# Altium PCB mo_phong_may_bay_pcb.PcbDoc
Units mil, origin at the board's own origin, x right, y up, seen from the top; angles counter-clockwise.
Board outline 2362.2 x 2165.35 mil, 2 copper layers (Top Layer, Bottom Layer); 98 components, 75 nets, 328 pads, 80 vias.
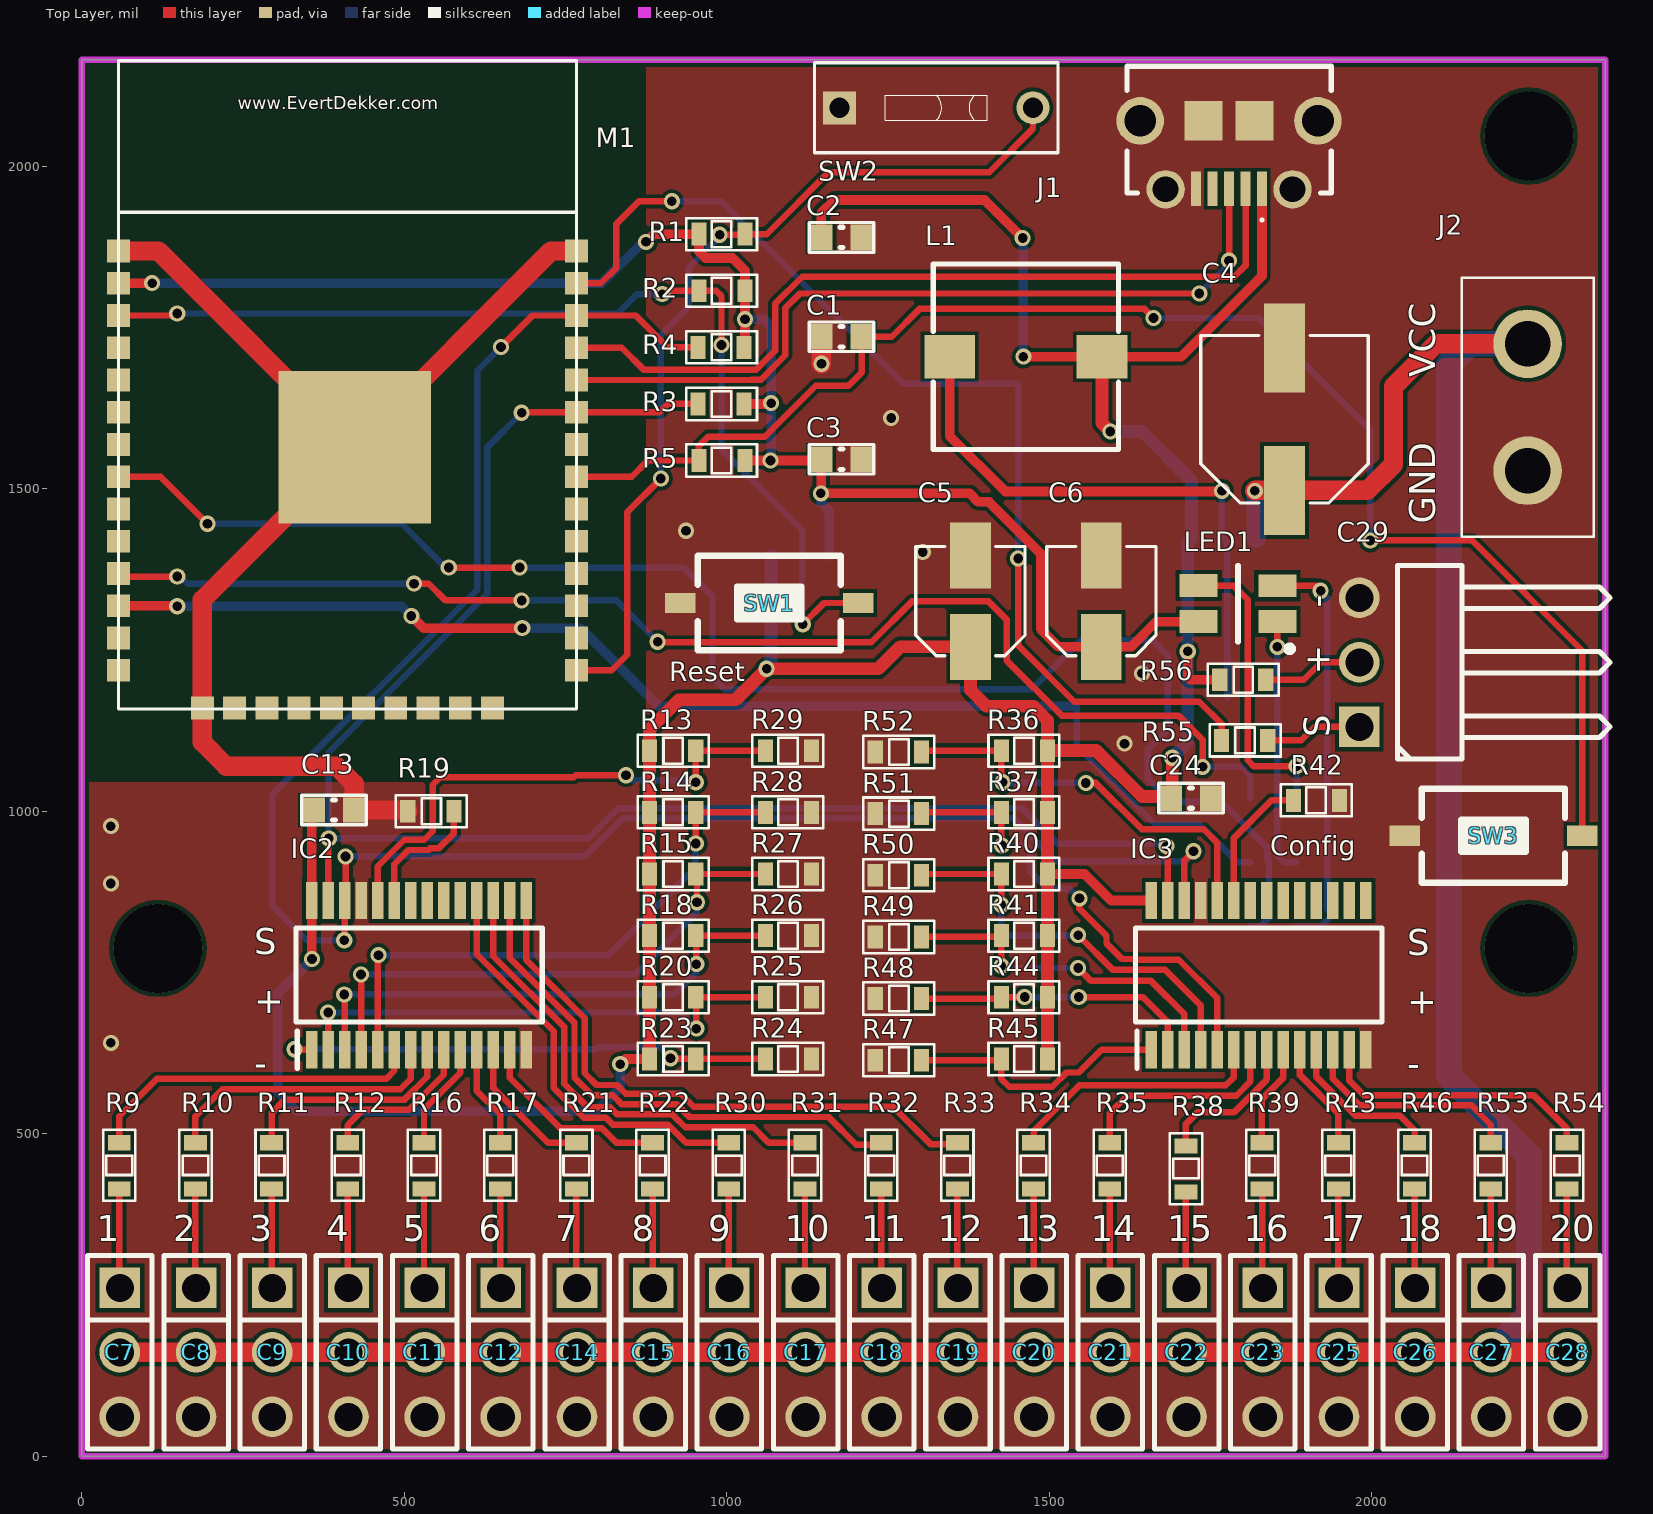
[diagram p0: Top Layer view]
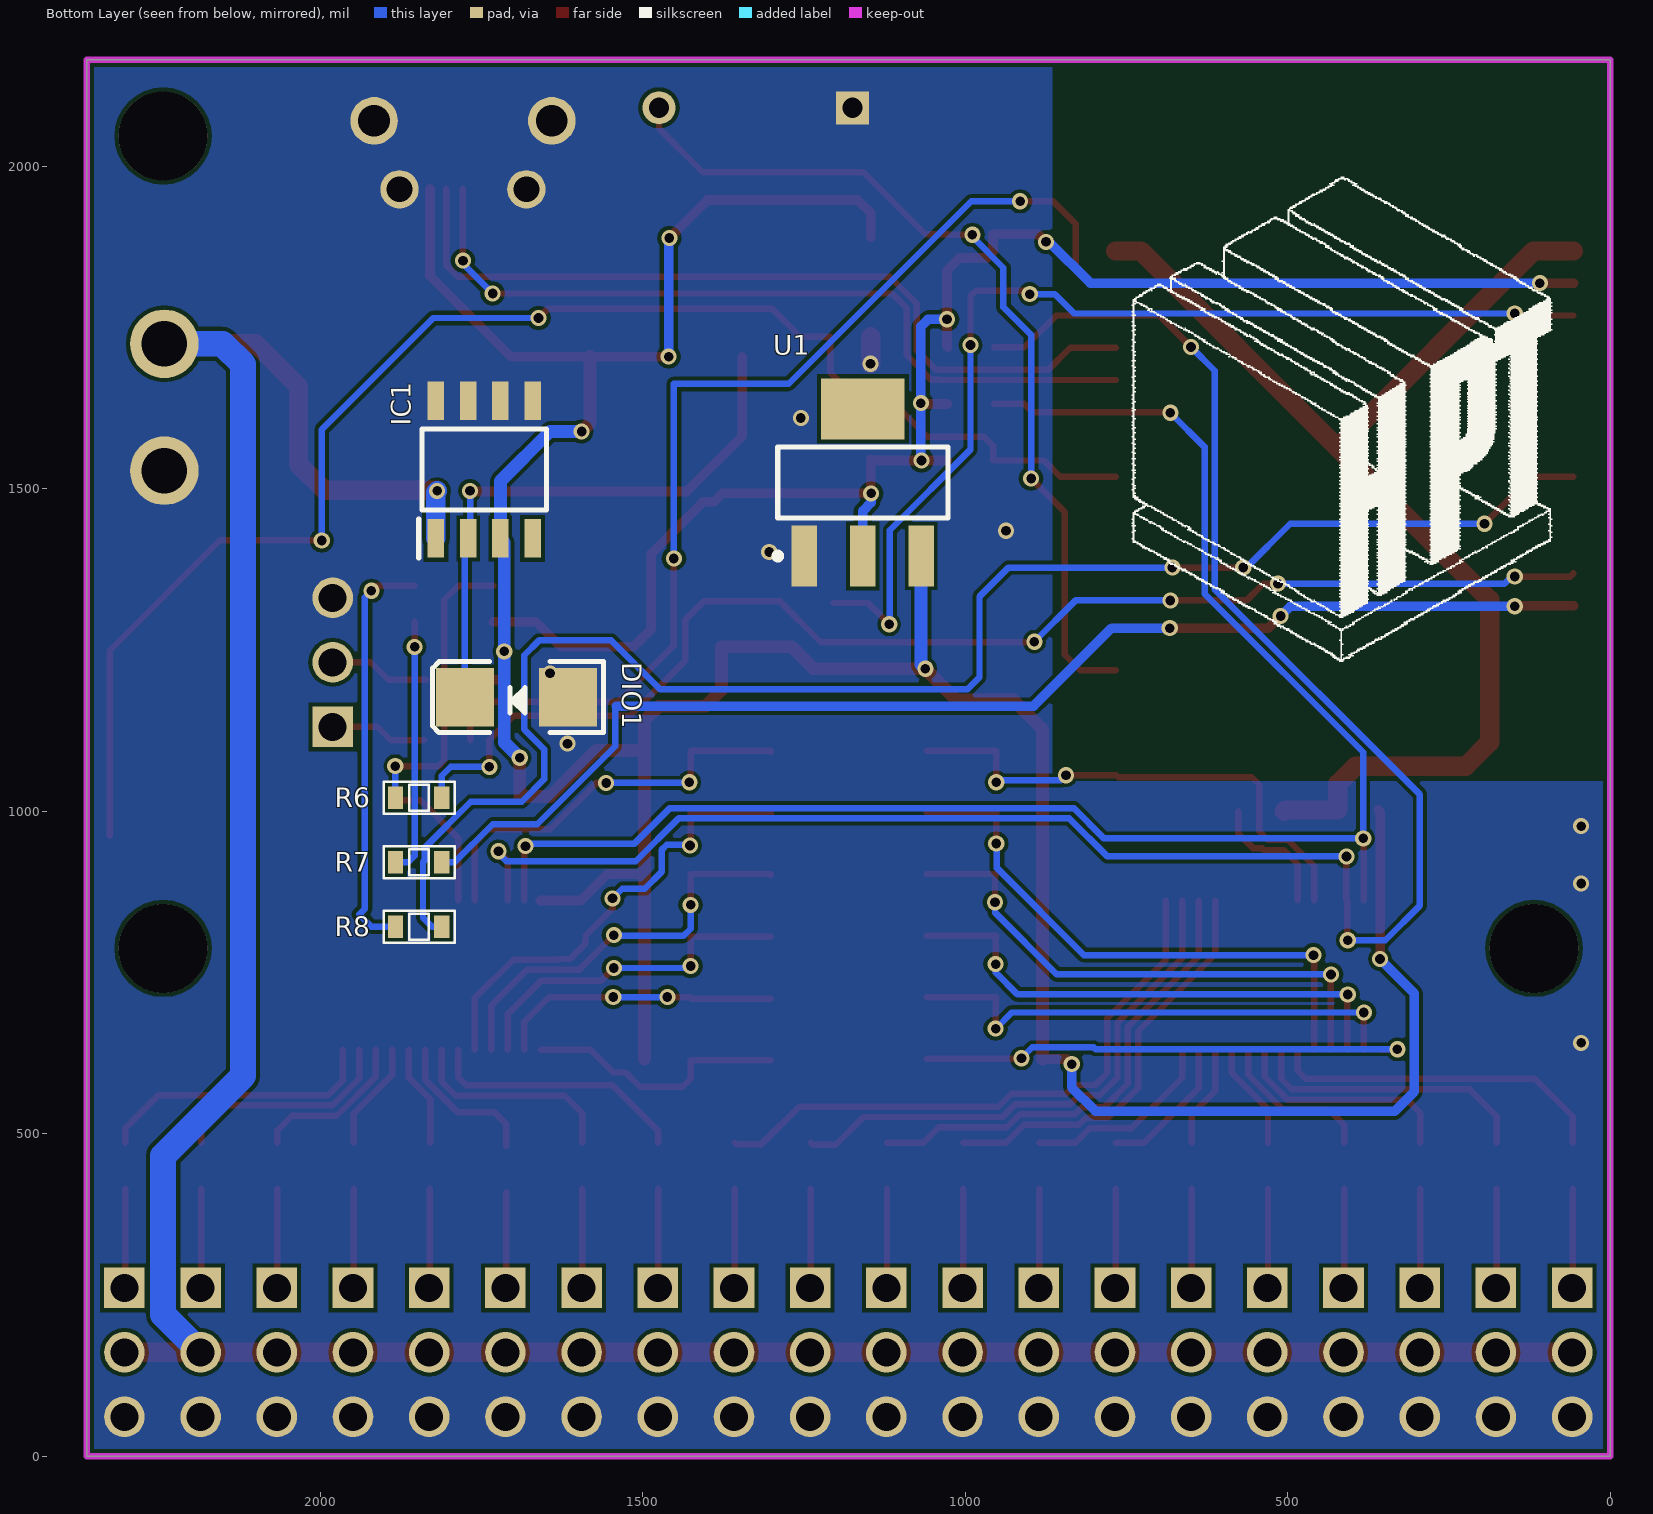
[diagram p1: Bottom Layer view, seen from below]
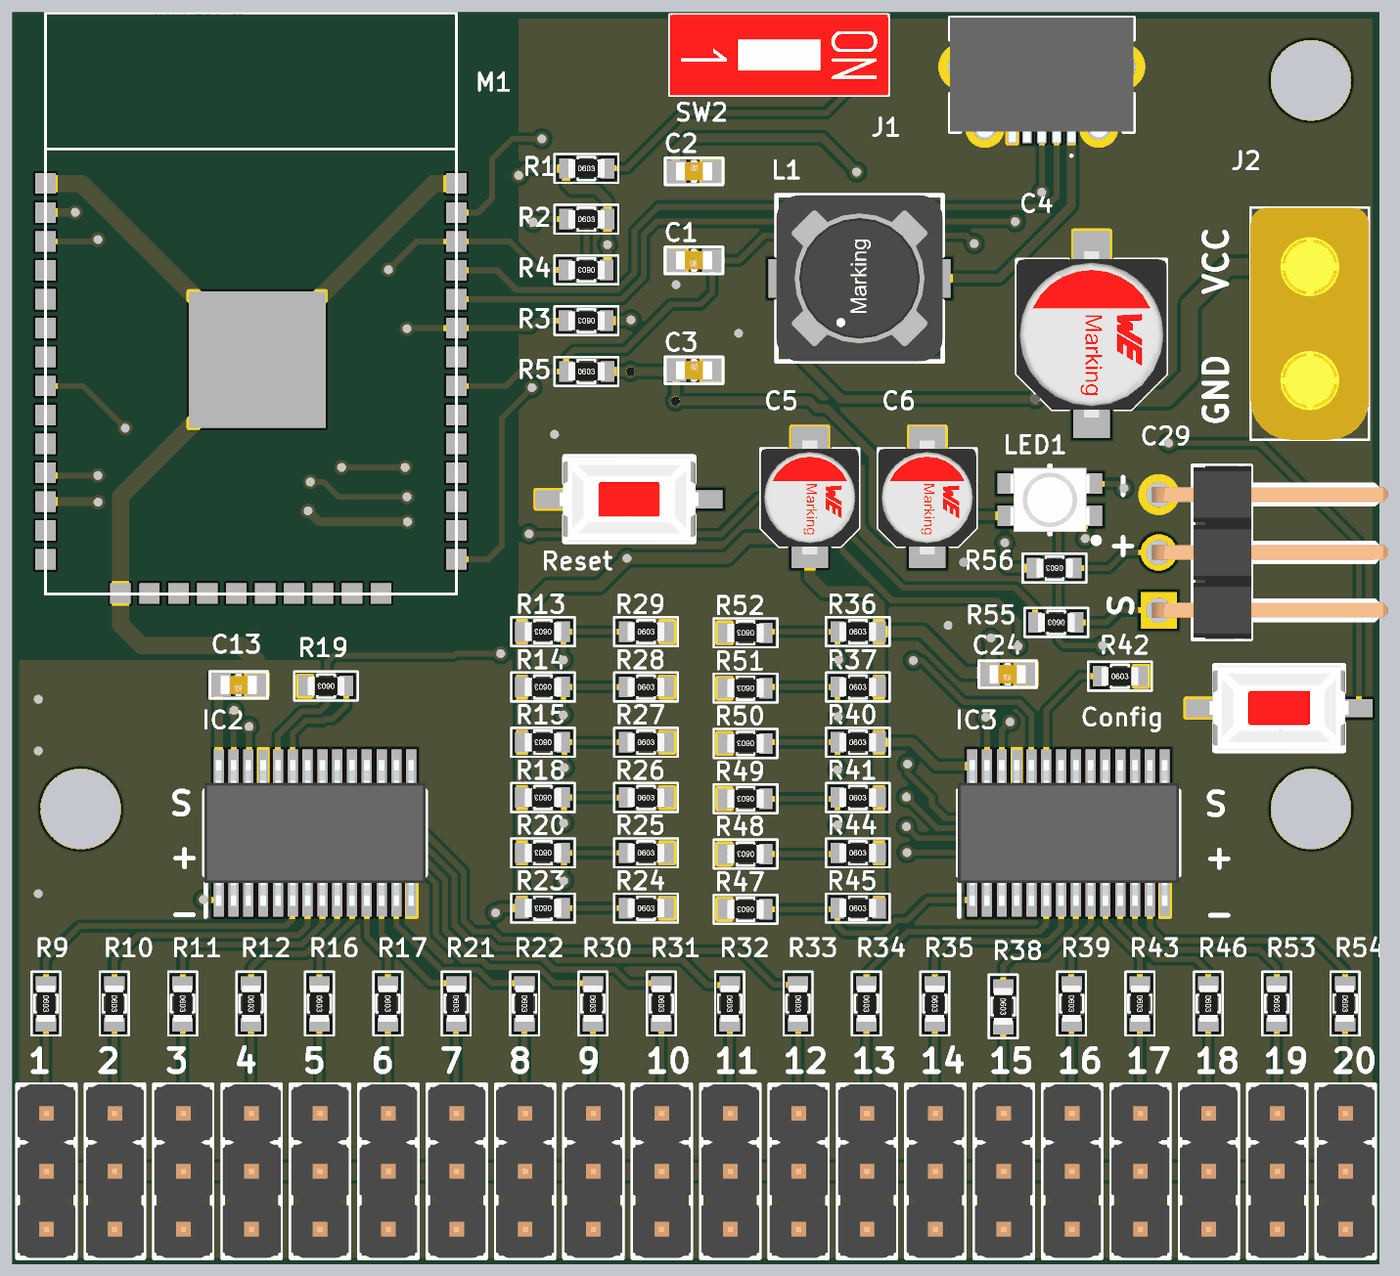
[diagram p2: 3D render of the assembled board from above, using the file's embedded part models]
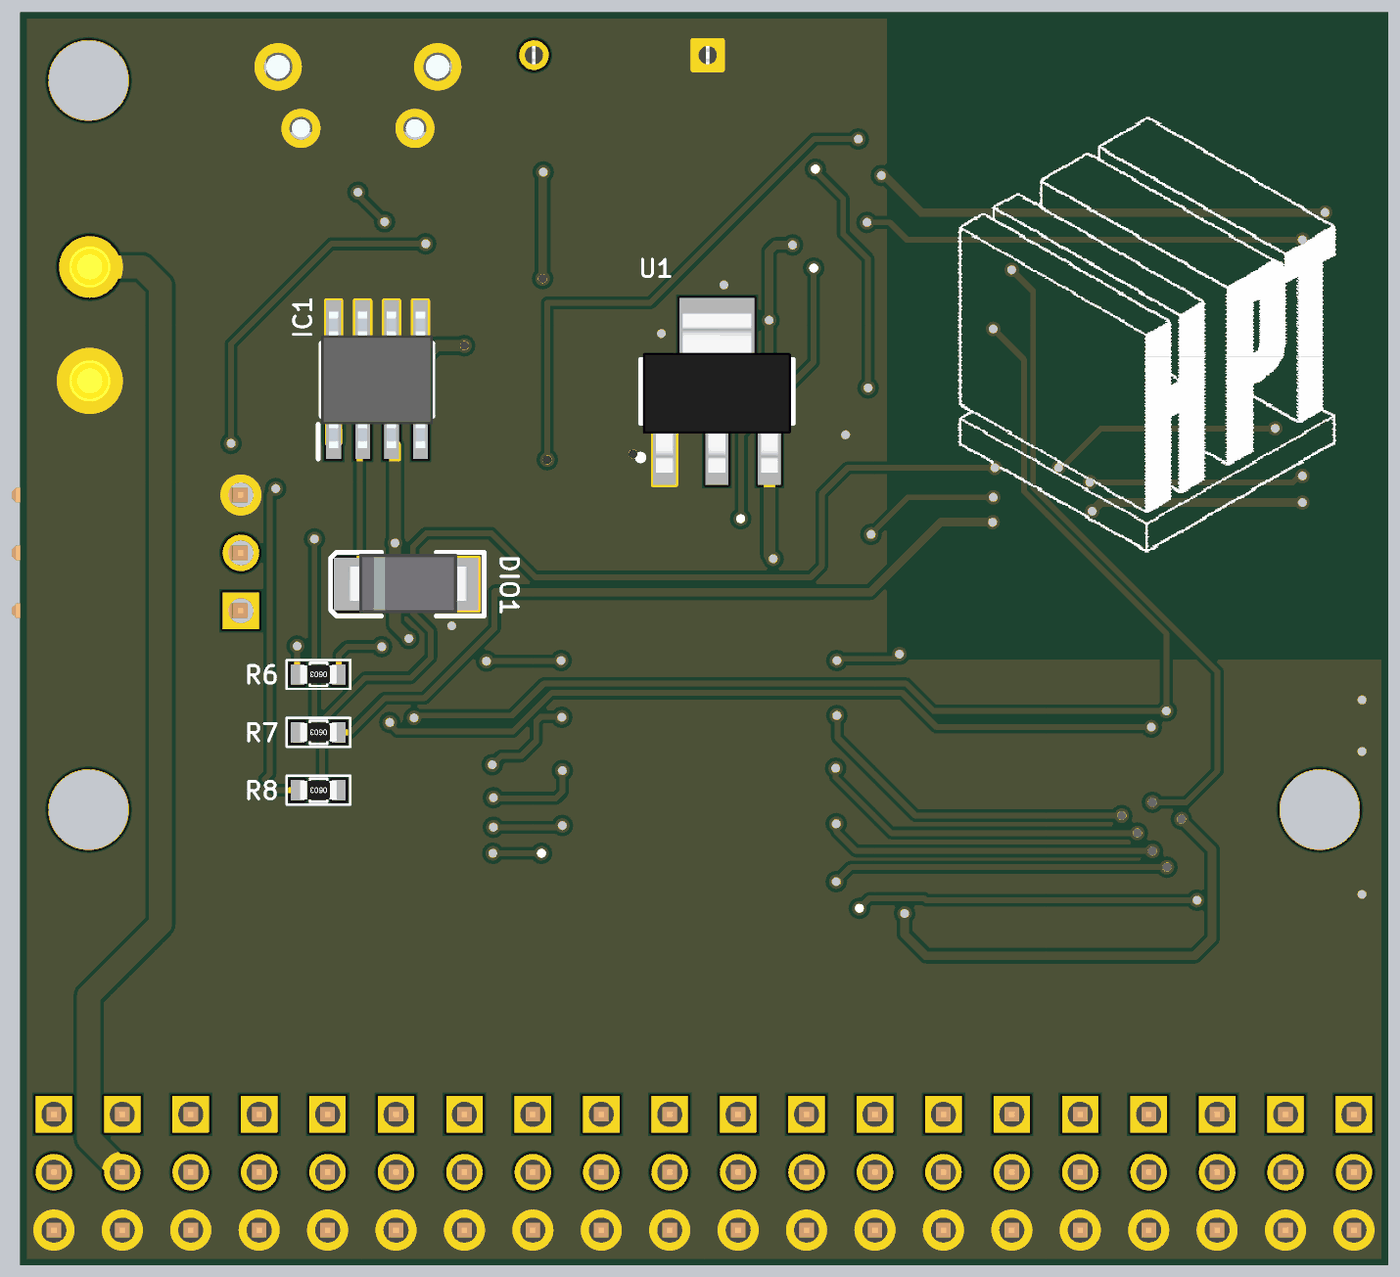
[diagram p3: 3D render of the assembled board from below, using the file's embedded part models]

## Layer stack, top to bottom
Top Solder: solder mask 0.4, Solder Resist, Dk 3.5
Top Layer: signal copper 1.4
Dielectric 1: dielectric 12.6, FR-4, Dk 4.8
Bottom Layer: signal copper 1.4
Bottom Solder: solder mask 0.4, Solder Resist, Dk 3.5

## Board outline
0,0 0,2165.35 2362.2,2165.35 2362.2,0

## Design rules (kind name [scope] priority, off if disabled: settings)
Clearance [All] p1: gap=6
PlaneConnect [All] p1: planeconnectstyle=Direct reliefexpansion=20 reliefentries=4 reliefconductorwidth=10 reliefairgap=10
PolygonConnect [All] p1: connectstyle=Direct reliefconductorwidth=10 reliefentries=4 polygonreliefangle="90 Angle" airgapwidth=10
RoomDefinition [3]Motor [InComponentClass('[3]Motor')] p1: confinementstyle=ConfineIn formatcopy=TRUE lockcomponents=FALSE outline 3300,1785 18415,1785 18415,2205 3300,2205
RoomDefinition [2]Power [InComponentClass('[2]Power')] p2: confinementstyle=ConfineIn formatcopy=TRUE lockcomponents=FALSE outline 3300,1245 5935,1245 5935,1735 3300,1735
RoomDefinition [1]Esp32 [InComponentClass('[1]Esp32')] p3: confinementstyle=ConfineIn formatcopy=TRUE lockcomponents=FALSE outline 3300,50 6530,50 6530,1195 3300,1195
RoutingVias [All] p1: holewidth=15 width=25 viastyle="Through Hole" minholewidth=15 minwidth=25 maxholewidth=28 maxwidth=50
SolderMaskExpansion [All] p1: expansion=4
Width [All] p1: maxlimit=50 minlimit=8 preferedwidth=10
29 further rules are at their usual default settings.

## Classes and differential pairs
component class [1]Esp32: C1 C29 J1 LED1 M1 R1 R2 R3 R4 R5 R6 R7 R8 R55 R56 SW1 SW2 SW3
component class [2]Power: C2 C3 C4 C5 C6 DIO1 IC1 J2 L1 U1
component class [3]Motor: C7 C8 C9 C10 C11 C12 C13 C14 C15 C16 C17 C18 C19 C20 C21 C22 C23 C24 C25 C26 C27 C28 IC2 IC3 R9 R10 R11 R12 R13 R14 R15 R16 R17 R18 R19 R20 R21 R22 R23 R24 R25 R26 R27 R28 R29 R30 R31 R32 R33 R34 R35 R36 R37 R38 R39 R40 R41 R42 R43 R44 R45 R46 R47 R48 R49 R50 R51 R52 R53 R54

## Components (designator, comment, footprint, x,y, rotation, side; value= is the part's Value field where it differs from the comment)
C1 "10uF" CN-SMD-0603 1178,1736 r180 top
C2 "10uF" CN-SMD-0603 1178,1890 r0 top
C3 "10uF" CN-SMD-0603 1178,1546 r0 top
C4 "470uF" CAP-ALU-SMD-6.3x7.7x2.2 1865,1608 r90 top
C5 "CN-ALU-SMD" CAP-ALU-SMD-4.5x5x1.4 1378,1326 r90 top
C6 "CN-ALU-SMD" CAP-ALU-SMD-4.5x5x1.4 1581,1326 r90 top
C7 "JP3" JP3-D1T 59,261 r270 top
C8 "JP3" JP3-D1T 177.16,261 r270 top
C9 "JP3" JP3-D1T 295.32,261 r270 top
C10 "JP3" JP3-D1T 413.47,261 r270 top
C11 "JP3" JP3-D1T 531.63,261 r270 top
C12 "JP3" JP3-D1T 649.79,261 r270 top
C13 "0.1uF" CN-SMD-0603 391,1002 r180 top
C14 "JP3" JP3-D1T 767.95,261 r270 top
C15 "JP3" JP3-D1T 886.1,261 r270 top
C16 "JP3" JP3-D1T 1004.26,261 r270 top
C17 "JP3" JP3-D1T 1122.42,261 r270 top
C18 "JP3" JP3-D1T 1240.58,261 r270 top
C19 "JP3" JP3-D1T 1358.74,261 r270 top
C20 "JP3" JP3-D1T 1476.89,261 r270 top
C21 "JP3" JP3-D1T 1595.05,261 r270 top
C22 "JP3" JP3-D1T 1713.21,261 r270 top
C23 "JP3" JP3-D1T 1831.37,261 r270 top
C24 "0.1uF" CN-SMD-0603 1720,1020.54 r180 top
C25 "JP3" JP3-D1T 1949.52,261 r270 top
C26 "JP3" JP3-D1T 2067.68,261 r270 top
C27 "JP3" JP3-D1T 2185.84,261 r270 top
C28 "JP3" JP3-D1T 2304,261 r270 top
C29 "JP3" JP3-D1C 2081,1381 r90 top
DIO1 "SS34" DIO-SMD-106 1696,1177 r180 bottom
IC1 "XL1509-5.0E1" SOIC127P600X175-8N 1746,1530 r90 bottom
IC2 "PCA9685PW,112" SOP65P640X110-28N 523,746 r90 top
IC3 "PCA9685PW,112" SOP65P640X110-28N 1825,746 r90 top
J1 "10118194-0001LF_BKN" 101181940001LFBKN 1779,2057 r180 top
J2 "XT30PB" XT30PB 2242,1725 r0 top
L1 "1.0 μH" L-SMD-M-7.3x4.5 1464,1705 r270 top
LED1 "150141M173100" "LED RGB 3528" 1793,1322 r180 top
M1 "ESP32S_Module" ESP32S 57,1158.85 r0 top
R1 "10K" RES-SMD-0603 992,1895 r0 top
R2 "10K" RES-SMD-0603 992,1807.25 r0 top
R3 "4K7" RES-SMD-0603 991.99,1631.75 r180 top
R4 "4K7" RES-SMD-0603 991.99,1719.5 r180 top
R5 "10K" RES-SMD-0603 992,1544 r0 top
R6 "3K3" RES-SMD-0603 1847,1021 r0 bottom
R7 "3K3" RES-SMD-0603 1847,921 r0 bottom
R8 "3K3" RES-SMD-0603 1847,821 r0 bottom
R9 "220R" RES-SMD-0603 58,451 r270 top
R10 "220R" RES-SMD-0603 176.16,451 r270 top
R11 "220R" RES-SMD-0603 294.32,451 r270 top
R12 "220R" RES-SMD-0603 412.47,451 r270 top
R13 "0R" RES-SMD-0603 917,1094 r180 top
R14 "DNI" RES-SMD-0603 917,998.4 r180 top
R15 "DNI" RES-SMD-0603 917,902.8 r180 top
R16 "220R" RES-SMD-0603 530.63,451.01 r270 top
R17 "220R" RES-SMD-0603 648.79,451 r270 top
R18 "DNI" RES-SMD-0603 917,807.2 r180 top
R19 "10K" RES-SMD-0603 542,1000 r180 top
R20 "DNI" RES-SMD-0603 917,711.6 r180 top
R21 "220R" RES-SMD-0603 766.95,451.01 r270 top
R22 "220R" RES-SMD-0603 885.1,451 r270 top
R23 "0R" RES-SMD-0603 917,616 r180 top
R24 "10K" RES-SMD-0603 1095,616 r0 top
R25 "10K" RES-SMD-0603 1095,711.6 r0 top
R26 "10K" RES-SMD-0603 1095,807.2 r0 top
R27 "10K" RES-SMD-0603 1095,902.8 r0 top
R28 "10K" RES-SMD-0603 1095,998.4 r0 top
R29 "10K" RES-SMD-0603 1095,1094 r0 top
R30 "220R" RES-SMD-0603 1003.26,451.01 r270 top
R31 "220R" RES-SMD-0603 1121.42,451 r270 top
R32 "220R" RES-SMD-0603 1239.58,451 r270 top
R33 "220R" RES-SMD-0603 1357.74,451 r270 top
R34 "220R" RES-SMD-0603 1475.89,451 r270 top
R35 "220R" RES-SMD-0603 1594.05,451 r270 top
R36 "0R" RES-SMD-0603 1461,1094 r0 top
R37 "0R" RES-SMD-0603 1461,998.4 r0 top
R38 "220R" RES-SMD-0603 1712.21,446 r270 top
R39 "220R" RES-SMD-0603 1830.37,451 r270 top
R40 "DNI" RES-SMD-0603 1461,902.8 r0 top
R41 "DNI" RES-SMD-0603 1461,807.2 r0 top
R42 "10K" RES-SMD-0603 1914,1017 r0 top
R43 "220R" RES-SMD-0603 1948.52,451 r270 top
R44 "DNI" RES-SMD-0603 1461,711.6 r0 top
R45 "0R" RES-SMD-0603 1461,616 r0 top
R46 "220R" RES-SMD-0603 2066.68,451.01 r270 top
R47 "10K" RES-SMD-0603 1267,614 r180 top
R48 "10K" RES-SMD-0603 1267,709.6 r180 top
R49 "10K" RES-SMD-0603 1267,805.2 r180 top
R50 "10K" RES-SMD-0603 1267,900.8 r180 top
R51 "10K" RES-SMD-0603 1267,996.4 r180 top
R52 "10K" RES-SMD-0603 1267,1092 r180 top
R53 "220R" RES-SMD-0603 2184.84,451 r270 top
R54 "220R" RES-SMD-0603 2303,451.01 r270 top
R55 "220R" RES-SMD-0603 1804,1110 r180 top
R56 "DNI" RES-SMD-0603 1801,1204 r180 top
SW1 "Reset" SW1-SMD 1066,1323 r180 top
SW2 "Flash" SW-DIP1-1 1325,2091 r270 top
SW3 "Config" SW1-SMD 2189,962 r0 top
U1 "LM1117-3.3V" SOT223 1159,1510 r180 bottom

## Footprints (in the part's own frame and the unit in brackets; to place one, negate y for a bottom-side part, rotate by r counter-clockwise, add the part's x,y. Pads: shape width x height; smd on the part's side, far side on the other; paste and mask are expansions set on the pad)
101181940001LFBKN [mm]
  rect 0.4x1.35 smd: 1(-1.3,2.325) 2(-0.65,2.325) 3(0,2.325) 4(0.65,2.325) 5(1.3,2.325)
  round 1.515 hole 1.01: MH1(-2.5,2.35) MH2(2.5,2.35)
  round 1.875 hole 1.25: MH3(-3.5,-0.35) MH4(3.5,-0.35)
  rect 1.5x1.55 smd: MP1(-1,-0.35) MP2(1,-0.35)
  silkscreen extent -4.03,-2.5 4.03,3.6, body extent -4.03,-2.5 4.03,2.96, height 2.88
CAP-ALU-SMD-4.5x5x1.4 [mm]
  rect 2.6x1.6 smd: 1(-1.8,0) 2(1.8,0)
  silkscreen extent -2.15,-2.15 2.15,2.15, body extent -2.5,-2.15 2.5,2.15, height 5.45
CAP-ALU-SMD-6.3x7.7x2.2 [mm]
  rect 3.5x1.6 smd: 1(-2.8,0) 2(2.8,0)
  silkscreen extent -3.3,-3.3 3.3,3.3, body extent -3.65,-3.3 3.65,3.3, height 7.65
CN-SMD-0603 [mm]
  rect 0.9x1 smd: 1(-0.8,0) 2(0.8,0)
  silkscreen extent -1.27,-0.58 1.27,0.58, body extent -0.8,-0.4 0.8,0.4, height 0.3
DIO-SMD-106 [mil]
  rect 90x90.55 smd: 1(80,0) 2(-80,0)
  silkscreen extent -130,-55 135,55, body extent -99,-50 106,52, height 95
ESP32S [mm] "ESP32S-Module"
  rect 0.9x0.9 smd: 1(0,18.034) 2(0,16.764) 3(0,15.494) 4(0,14.224) 5(0,12.954) 6(0,11.684) 7(0,10.414) 8(0,9.144) 9(0,7.874) 10(0,6.604) 11(0,5.334) 12(0,4.064) 13(0,2.794) 14(0,1.524) 15(3.3,0.034) 16(4.57,0.034) 17(5.84,0.034) 18(7.11,0.034) 19(8.38,0.034) 20(9.65,0.034) 21(10.92,0.034) 22(12.19,0.034) 23(13.46,0.034) 24(14.73,0.034) 25(18.034,1.524) 26(18.034,2.794) 27(18.034,4.064) 28(18.034,5.334) 29(18.034,6.604) 30(18.034,7.874) 31(18.034,9.144) 32(18.034,10.414) 33(18.034,11.684) 34(18.034,12.954) 35(18.034,14.224) 36(18.034,15.494) 37(18.034,16.764) 38(18.034,18.034)
  rect 6x6 smd: 101(9.3,10.3)
  silkscreen extent 0,0 18.03,25.53, body extent 0,0 18.03,25.53, height 2
JP3-D1C [mm] "3 pins, 1 row, right angled, gold plating"
  rect 1.6x1.6 hole 1.1: 1(-6.35,2.54)
  round 1.6 hole 1.1: 2(-3.81,2.54) 3(-1.27,2.54)
  silkscreen extent -7.62,-7.34 0,1.04, body extent -7.62,-7.52 0,2.84, height 2.55
JP3-D1T [mm] "3 pins, 1 row, straight, gold plating"
  rect 1.6x1.6 hole 1.1: 1(0,0)
  round 1.6 hole 1.1: 2(2.54,0) 3(5.08,0)
  silkscreen extent -1.27,-1.27 6.35,1.27, body extent -1.27,-1.27 6.35,1.27, height 8.54
L-SMD-M-7.3x4.5 [mm] "WE-PDA SMD Shielded Power Inductor, 7345"
  rect 1.7x2 smd: 1(0,3) 2(0,-3)
  silkscreen extent -3.65,-3.65 3.65,3.65, body extent -3.65,-3.65 3.65,3.65, height 4.05
"LED RGB 3528" [mm] "Chip LED, 4-Leads, Body 2.8x3.5mm (max), Pitch 1.42mm, IPC Medium Density"
  rect 1.5x0.9 smd: 1(1.55,0.707) 2(1.55,-0.71) 3(-1.55,0.707) 4(-1.55,-0.707)
  silkscreen extent -2.16,-1.5 0.03,1.9, body extent -1.75,-1.4 1.75,1.4, height 1.87
RES-SMD-0603 [mm]
  rect 0.6x0.9 smd: 1(-0.889,0) 2(0.927,0)
  silkscreen extent -1.4,-0.64 1.4,0.64, body extent -0.8,-0.4 0.8,0.4, height 0.43
SOIC127P600X175-8N [mm]
  rect 1.525x0.65 smd: 1(-2.712,1.905) 2(-2.712,0.635) 3(-2.712,-0.635) 4(-2.712,-1.905) 5(2.712,-1.905) 6(2.712,-0.635) 7(2.712,0.635) 8(2.712,1.905)
  silkscreen extent -3.47,-2.45 1.6,2.58, body extent -3,-2.45 3,2.45, height 1.75
SOP65P640X110-28N [mm]
  rect 1.475x0.45 smd: 1(-2.938,4.225) 2(-2.938,3.575) 3(-2.938,2.925) 4(-2.938,2.275) 5(-2.938,1.625) 6(-2.938,0.975) 7(-2.938,0.325) 8(-2.938,-0.325) 9(-2.938,-0.975) 10(-2.938,-1.625) 11(-2.938,-2.275) 12(-2.938,-2.925) 13(-2.938,-3.575) 14(-2.938,-4.225) 15(2.938,-4.225) 16(2.938,-3.575) 17(2.938,-2.925) 18(2.938,-2.275) 19(2.938,-1.625) 20(2.938,-0.975) 21(2.938,-0.325) 22(2.938,0.325) 23(2.938,0.975) 24(2.938,1.625) 25(2.938,2.275) 26(2.938,2.925) 27(2.938,3.575) 28(2.938,4.225)
  silkscreen extent -3.67,-4.85 1.85,4.85, body extent -3.2,-4.85 3.2,4.85, height 1.1
SOT223 [mm]
  rect 1x2.4 smd: 1(-2.3,-2.9) 2(0,-2.9) 3(2.3,-2.9)
  rect 3.3x2.4 smd: 4(0,2.9)
  silkscreen extent -3.48,-3.02 3.35,1.4, body extent -3.25,-3.56 3.25,3.4, height 1.68
SW1-SMD [mm]
  rect 1.2x0.8 smd: 1(-3.5,0) 2(3.5,0)
  silkscreen extent -2.82,-1.85 2.82,1.85, body extent -3.05,-1.85 3.05,1.85, height 2.5
SW-DIP1-1 [mm] "01p, 2.54mm Pitch, Horizontal, Box Type, THT, flat Actuator, red, without Tape, Tube"
  rect 1.3x1.3 hole 0.8: 1(0,-3.81)
  round 1.3 hole 0.8: 2(0,3.81)
  silkscreen extent -1.77,-4.8 1.77,4.8, body extent -1.77,-4.8 1.77,4.8, height 5.4
XT30PB [mm]
  round 2.7 hole 1.8: 1(0,0) 2(0,-5)
  silkscreen extent -2.6,-7.6 2.6,2.6, body extent -2.6,-7.6 2.6,2.6, height 10.66

## Part data
C1 C2 C3 C13 C24: library part CN, "Tu gom"
C4: library part CN-ALU-SMD, "Polarized Capacitor (Axial)"
C5 C6: "Polarized Capacitor (Axial)"
C7 C8 C9 C10 C11 C12 C14 C15 C16 C17 C18 C19 C20 C21 C22 C23 C25 C26 C27 C28 C29: "WR-PHD 2.54 mm Angled Socket Header"
DIO1: library part "Diode SMD", "Default Diode"
IC1 IC2 IC3: "Integrated Circuit"
J1 J2: "Connector"
L1: library part L-SMD-1
LED1: library part "LED RGB SMD", "SMD Full-Color Top LED, WL-SFTW, Red & Green & Blue"
M1: "Esp-32S"
R1 R2 R3 R4 R5 R6 R7 R8 R9 R10 R11 R12 R13 R14 R15 R16 R17 R18 R19 R20 R21 R22 R23 R24 R25 R26 R27 R28 R29 R30 R31 R32 R33 R34 R35 R36 R37 R38 R39 R40 R41 R42 R43 R44 R45 R46 R47 R48 R49 R50 R51 R52 R53 R54 R55 R56: library part Res-SMD, "Resistor"
SW1 SW2 SW3: library part SW2, "Switch button 2 pin"
U1: library part LM1117, "800mA Low-Dropout Linear Regulator"

## Free pads (board coordinates)
  round 137.8 hole 137.8: 2(118.11,787.4) 2(2244.09,787.4) 2(2244.09,2047.24)

## Via types
v1: diameter 25, hole 15, Top Layer to Bottom Layer, tented both sides, 80 vias

## Nets (pads, with @x,y where several pads share a name; then routed paths per layer and width w, separated by ;. In a path a pad name is that pad's centre, name@x,y a point inside that pad or via, vN(x,y) a via of type N, cw(c..) or ccw(c..) an arc to the next point about the centre after c; other vN are vias at no path point)
3V3: C3.1 C6.1 LED1.1 M1.2 R1.1 R2.2 R3.1 R4.1 R5.2 U1.2 | length 2503.7
  Top Layer w15: M1.2 108.85,1818.85 v1(109,1819) ; v1(875,1883) 887,1895 R1.1 957,1868 967,1858 1009,1858 1028.49,1838.51 R2.2 v1(1028.49,1763) 1028.49,1720.99 R4.1 ; R3.1 1067.75,1631.75 v1(1069,1633) ; R5.2 v1(1068,1544) 1144.5,1544 C3.1 1146.5,1493.5 v1(1146,1493) 1377,1493 1390,1480 1407,1480 1487,1400 1487,1283 1514.87,1255.13 C6.1 1627.13,1255.13 1666.15,1294.15 LED1.1
  Bottom Layer w15: v1(109,1819) 806,1819 870,1883 v1(875,1883) ; v1(1028.49,1763) 1058,1763 1069,1752 v1(1069,1633) 1069,1544 1068,1543 v1(1068,1544) ; v1(1146,1493) 1146,1479 1159,1466 U1.2
5V: C2.1 C5.1 C13.2 C24.2 IC1.3 IC2.28 IC3.28 J1.1 L1.1 R13.2 R14.2 R15.2 R18.2 R20.2 R23.2 R36.2 R37.2 R40.2 R41.2 R44.2 R45.2 R56.2 U1.3 | length 5471.8
  Top Layer w15: v1(357,771) 356.66,771.34 IC2.28 356.66,999.16 C13.2 ; v1(835,608) 843,616 R23.2 ; C2.1 1146.5,1927.5 1167,1948 1400,1948 v1(1459,1889) ; v1(1460,1705) L1.1 1705,1705 1830.18,1830.18 J1.1 ; R40.2 1555.2,902.8 1596.33,861.67 IC3.28 ; v1(1715,1248) 1715,1208 1719,1204 R56.2
  Top Layer w20: R23.2 R20.2 R18.2 R15.2 R14.2 R13.2 880.51,1127.51 926,1173 1014,1173 v1(1062,1221) 1235,1221 1269.13,1255.13 C5.1 1378,1188 1403,1163 1475.3,1163 1497.49,1140.81 R36.2 ; R45.2 R44.2 R41.2 R40.2 R37.2 R36.2 ; L1.1 1582.11,1601.89 v1(1595,1589) ; v1(1691,1083) 1691,1023.04 1643.96,1023.04 1573,1094 R36.2
  Bottom Layer w15: v1(357,771) 304,718 304,565 334,535 798,535 835,572 v1(835,608) ; v1(1459,1889) 1460,1888 v1(1460,1705)
  Bottom Layer w20: v1(1062,1221) 1068.45,1227.45 U1.3 ; v1(1595,1589) 1644,1589 1721,1512 IC1.3 1715,1417.23 v1(1715,1248) 1715,1107 v1(1691,1083)
A0: IC2.1 R23.1 R24.1 | length 765.6
  Top Layer w10: v1(330,631) 330.67,630.33 IC2.1 ; v1(913,617) 914,616 R23.1 R24.1
  Bottom Layer w10: v1(330,631) 798,631 801,634 896,634 v1(913,617)
A1: IC2.2 R20.1 R25.1 | length 796.1
  Top Layer w10: v1(382,688) 382.25,687.75 IC2.2 ; v1(953,663) 953,710.6 R20.1 R25.1
  Bottom Layer w10: v1(382,688) 928,688 v1(953,663)
A1_0: IC3.1 R45.1 R47.1 | length 414.4
  Top Layer w10: R47.1 1426,614 1426,585 1438,573 1505,573 1527,595 1546,595 1581.33,630.33 IC3.1
A1_1: IC3.2 R44.1 R48.1 | length 443.1
  Top Layer w10: R48.1 1426,709.6 R44.1 1461.6,711.6 v1(1462,712) ; v1(1546,712) 1645,712 1684.25,672.75 IC3.2
  Bottom Layer w10: v1(1462,712) v1(1546,712)
A1_2: IC3.3 R41.1 R49.1 | length 538.9
  Top Layer w10: R49.1 1426,805.2 v1(1426,760) ; v1(1545,757) 1565,737 1658,737 1709.84,685.16 IC3.3
  Bottom Layer w10: v1(1426,760) 1429,757 v1(1545,757)
A1_3: IC3.4 R40.1 R50.1 | length 638.8
  Top Layer w10: R50.1 1302,902.8 R40.1 v1(1426,855) ; v1(1545,808) 1599,754 1680,754 1735.43,698.57 IC3.4
  Bottom Layer w10: v1(1426,855) 1426,818 1437,807 1544,807 v1(1545,808)
A1_4: IC3.5 R37.1 R51.1 | length 726.8
  Top Layer w10: R51.1 1302,998.4 R37.1 1426,948 v1(1427,947) ; v1(1547,865) 1547,849 1589,807 1589,795 1613,771 1630,771 1631,770 1701,770 1761.02,709.98 IC3.5
  Bottom Layer w10: v1(1427,947) 1428,948 1463,948 1471,940 1471,906 1497,880 1532,880 v1(1547,865)
A1_5: IC3.24 R36.1 R52.1 | length 637.1
  Top Layer w10: R52.1 1302,1094 R36.1 1426,1047 v1(1428,1045) ; v1(1557,1044) 1572,1044 1644,972 1740,972 1761,951 1761,910 IC3.24
  Bottom Layer w10: v1(1428,1045) 1429,1044 v1(1557,1044)
A2: IC2.3 R18.1 R26.1 | length 811.7
  Top Layer w10: v1(407,716) 407.84,715.16 IC2.3 ; v1(953,763) 953,806.2 R18.1 R26.1
  Bottom Layer w10: v1(407,716) 919,716 953,750 v1(953,763)
A3: IC2.4 R15.1 R27.1 | length 846.2
  Top Layer w10: v1(433,747) 433.43,746.57 IC2.4 ; v1(954,859) 954,900.8 R15.1 R27.1
  Bottom Layer w10: v1(433,747) 858,747 954,843 v1(954,859)
A4: IC2.5 R14.1 R28.1 | length 888.8
  Top Layer w10: IC2.5 459.02,776.02 v1(460,777) ; v1(952,950) R14.1 R28.1
  Bottom Layer w10: v1(460,777) 816,777 951,912 951,949 v1(952,950)
A5: IC2.24 R13.1 R29.1 | length 810.2
  Top Layer w10: IC2.24 459.02,915.02 500,956 531,956 544,969 544,1041 556,1053 763,1053 766,1056 v1(844,1056) ; v1(952,1045) R13.1 R29.1
  Bottom Layer w10: v1(844,1056) 852,1048 952,1048 v1(952,1045)
BTN_CONFIG: C1.1 M1.31 R5.1 SW3.2 | length 2320.9
  Top Layer w10: M1.31 852.85,1518.85 878,1544 R5.1 957,1567 971,1581 1059,1581 1138,1660 1189,1660 1209.5,1680.5 C1.1 1256,1736 1299,1779 1648,1779 v1(1662,1765) ; v1(1998,1420) 2156,1420 2326.8,1249.2 SW3.2
  Bottom Layer w10: v1(1662,1765) 1825,1765 1998,1592 v1(1998,1420)
GND: C1.2 C2.2 C3.2 C4.2 C5.2 C6.2 C7.3 C8.3 C9.3 C10.3 C11.3 C12.3 C13.1 C14.3 C15.3 C16.3 C17.3 C18.3 C19.3 C20.3 C21.3 C22.3 C23.3 C24.1 C25.3 C26.3 C27.3 C28.3 C29.3 DIO1.1 IC1.5 IC1.6 IC1.7 IC1.8 IC2.14 IC2.25 IC3.14 IC3.25 J1.5 J1.MH1 J1.MH2 J1.MH3 J1.MH4 J1.MP1 J1.MP2 J2.2 M1.1 M1.15 M1.38 M1.101 R19.2 R24.2 R25.2 R26.2 R27.2 R28.2 R29.2 R42.2 R47.2 R48.2 R49.2 R50.2 R51.2 R52.2 SW1.2 SW2.1 SW3.1 U1.1 | length 1946.3
  Top Layer w30: M1.1 118.65,1868.85 M1.101 ; R19.2 503.51,1002 C13.1 422.5,1042.5 395,1070 224,1070 186.92,1107.08 M1.15 186.92,1328.15 M1.101 ; M1.38 727.63,1868.85 M1.101 ; C1.2 1146.5,1694.5 v1(1147,1694)
  other v1: 45,641 45,888 45,977 1617,1105 1644,1214 1304,1402 937,1435 1255,1610
LED_B: M1.11 R6.1 | length 2037.6
  Top Layer w10: M1.11 61.85,1364 v1(148,1364) ; v1(515,1353) 538,1353 564,1327 v1(682,1327) ; v1(893,1263) 893,1264 894,1265 897,1262 1224,1262 1288,1326 1405.37,1326 1434,1297.37 1434,1234 1519.5,1148.5 1700.5,1148.5 1738,1111 v1(1738,1069)
  Bottom Layer w10: v1(148,1364) 150,1366 151,1366 164,1353 v1(515,1353) ; v1(682,1327) 829,1327 v1(893,1263) ; v1(1738,1069) 1798,1069 1812,1055 R6.1
LED_G: M1.8 R8.1 | length 2456.7
  Top Layer w10: M1.8 122.15,1518.85 v1(195,1446) ; v1(569,1378) v1(679,1378)
  Bottom Layer w10: v1(195,1446) 496,1446 564,1378 v1(569,1378) ; v1(679,1378) 933,1378 978,1333 978,1208 997,1189 1473,1189 1549,1265 1661,1265 1684,1242 1684,1127 1653,1096 1653,1050 1688,1015 1767,1015 1838.02,943.98 1838.02,924.35 1841,921.37 1841,835 1827,821 R8.1
LED_R: M1.12 R7.1 | length 1954.9
  Top Layer w15: M1.12 147.15,1318.85 v1(148,1318) ; v1(511,1303) 530,1284 v1(683,1284)
  Bottom Layer w10: 1541,1163 1543,1161 1543,1101 1664,980 1733,980 1792,921 R7.1
  Bottom Layer w15: v1(148,1318) 496,1318 v1(511,1303) ; v1(683,1284) 773,1284 894,1163 1541,1163
NetC7_1: C7.1 R9.2 | length 153.9
  Top Layer w10: R9.2 58,262 C7.1
NetC8_1: C8.1 R10.2 | length 153.9
  Top Layer w10: R10.2 176.16,262 C8.1
NetC9_1: C9.1 R11.2 | length 153.9
  Top Layer w10: R11.2 294.32,262 C9.1
NetC10_1: C10.1 R12.2 | length 153.9
  Top Layer w10: R12.2 412.48,262 C10.1
NetC11_1: C11.1 R16.2 | length 153.9
  Top Layer w10: R16.2 530.64,262 C11.1
NetC12_1: C12.1 R17.2 | length 153.9
  Top Layer w10: R17.2 648.79,262 C12.1
NetC14_1: C14.1 R21.2 | length 153.9
  Top Layer w10: R21.2 766.95,262 C14.1
NetC15_1: C15.1 R22.2 | length 153.9
  Top Layer w10: R22.2 885.11,262 C15.1
NetC16_1: C16.1 R30.2 | length 153.9
  Top Layer w10: R30.2 1003.27,262 C16.1
NetC17_1: C17.1 R31.2 | length 153.9
  Top Layer w10: R31.2 1121.42,262 C17.1
NetC18_1: C18.1 R32.2 | length 153.9
  Top Layer w10: R32.2 1239.58,262 C18.1
NetC19_1: C19.1 R33.2 | length 153.9
  Top Layer w10: R33.2 1357.74,262 C19.1
NetC20_1: C20.1 R34.2 | length 153.9
  Top Layer w10: R34.2 1475.9,262 C20.1
NetC21_1: C21.1 R35.2 | length 153.9
  Top Layer w10: R35.2 1594.06,262 C21.1
NetC22_1: C22.1 R38.2 | length 148.9
  Top Layer w10: R38.2 1712.21,262 C22.1
NetC23_1: C23.1 R39.2 | length 153.9
  Top Layer w10: R39.2 1830.37,262 C23.1
NetC25_1: C25.1 R43.2 | length 153.9
  Top Layer w10: R43.2 1948.53,262 C25.1
NetC26_1: C26.1 R46.2 | length 153.9
  Top Layer w10: R46.2 2066.69,262 C26.1
NetC27_1: C27.1 R53.2 | length 153.9
  Top Layer w10: R53.2 2184.85,262 C27.1
NetC28_1: C28.1 R54.2 | length 153.9
  Top Layer w10: R54.2 2303,262 C28.1
NetC29_1: C29.1 R55.1 | length 150.7
  Top Layer w10: R55.1 1891,1110 1912,1131 C29.1
NetC29_2: C29.2 R56.1 | length 156.2
  Top Layer w10: R56.1 1895,1204 1922,1231 C29.2
NetDIO1_2: DIO1.2 IC1.2 L1.2 | length 904.4
  Top Layer w15: L1.2 1345.89,1582.11 1432,1496 1767,1496 v1(1768,1497)
  Bottom Layer w10: v1(1768,1497) 1768,1426.23 IC1.2 1776,1418.23 DIO1.2
NetIC2_23: IC2.23 R19.1 | length 202.6
  Top Layer w10: IC2.23 484.61,917.99 506.63,940 537.63,940 540.63,943 554,943 577,966 R19.1
NetIC3_23: IC3.23 R42.1 | length 213.5
  Top Layer w10: IC3.23 1786.61,958.61 1845,1017 R42.1
NetLED1_2: LED1.2 R6.2 | length 463.1
  Top Layer w10: LED1.2 1786.05,1349.95 1808,1328 1808,1079 1817,1070 v1(1884,1070)
  Bottom Layer w10: R6.2 1884,1021.51 v1(1884,1070)
NetLED1_3: LED1.3 R7.2 | length 396.8
  Top Layer w10: v1(1854.02,1255.02) LED1.3
  Bottom Layer w10: v1(1854.02,1255.02) 1854.02,930.98 1864,921 R7.2
NetLED1_4: LED1.4 R8.2 | length 645.1
  Top Layer w10: LED1.4 1914.15,1349.85 1921,1343 v1(1921,1342)
  Bottom Layer w10: R8.2 1921,821 1940,840 1931,849 1931,1332 v1(1921,1342)
NetM1_3: M1.3 R2.1 SW1.1 | length 1615
  Top Layer w10: M1.3 144.85,1768.85 v1(148,1772) ; v1(900,1802) 905.25,1807.25 R2.1 983.75,1807.25 992,1799 v1(992,1723) ; v1(1118,1290) 1151,1323 SW1.1
  Bottom Layer w10: v1(148,1772) 831,1772 861,1802 v1(900,1802) ; v1(992,1723) 992,1561 1117,1436 1117,1291 v1(1118,1290)
NetM1_25: M1.25 R1.2 SW2.2 | length 1385.6
  Top Layer w10: M1.25 821.85,1218.85 846,1243 846,1464 v1(898,1516) ; v1(989,1894) 1027.48,1894 R1.2 1062,1895 1158,1991 1407,1991 1475,2059 SW2.2
  Bottom Layer w10: v1(898,1516) 898,1739 941,1782 941,1843 989,1891 v1(989,1894)
RX: J1.2 M1.35 | length 1280.3
  Top Layer w10: M1.35 837.15,1718.85 871,1685 1046,1685 1075,1714 1075,1787 1117,1829 1787.23,1829 1804.59,1846.36 J1.2
S_IN: M1.37 R55.2 | length 1692.1
  Top Layer w10: M1.37 804.85,1818.85 829,1843 829,1911 864,1946 v1(915,1946) ; v1(1452,1392) 1452,1257 1539,1170 1733,1170 1767.51,1135.49 R55.2
  Bottom Layer w10: v1(915,1946) 991,1946 1274,1663 1452,1663 v1(1452,1392)
SCL: IC2.26 IC3.26 M1.36 R4.2 | length 3078.8
  Top Layer w10: v1(407,800) 407.84,800.84 IC2.26 409,862.83 v1(409,930) ; v1(650,1720) 698.85,1768.85 M1.36 859.15,1768.85 908.5,1719.5 R4.2 ; IC3.26 1709.84,923.84 v1(1724,938)
  Bottom Layer w10: v1(407,800) 349,800 295,854 295,1026 613,1344 613,1683 v1(650,1720) ; v1(409,930) 779.63,930 838.63,989 1444.63,989 1511.13,922.5 1711.5,922.5 v1@1724,935
SDA: IC2.27 IC3.27 M1.33 R3.2 | length 2589.6
  Top Layer w10: IC2.27 382.25,957.25 v1(383,958) ; v1(682,1618) 682.85,1618.85 M1.33 895.85,1618.85 908.75,1631.75 R3.2 ; v1(1682,946) 1684.25,943.75 IC3.27
  Bottom Layer w10: v1(682,1618) 629,1565 629,1337.37 383,1091.37 v1(383,958) 785,958 832,1005 1458,1005 1513,950 1681,950 1682,949 v1(1682,946)
SERVO2_1: IC3.6 R34.1 | length 406
  Top Layer w10: R34.1 1475.89,503.89 1547,575 1774,575 1786.61,587.61 IC3.6
SERVO2_2: IC3.7 R35.1 | length 333.7
  Top Layer w10: R35.1 1594.05,532.05 1621,559 1790,559 1812.2,581.2 IC3.7
SERVO2_3: IC3.8 R38.1 | length 234.5
  Top Layer w10: R38.1 1712.21,515.21 1730,533 1786.63,533 1837.8,584.17 IC3.8
SERVO2_4: IC3.9 R39.1 | length 158.3
  Top Layer w10: R39.1 1830,486.37 1830,553.75 1863.39,587.13 IC3.9
SERVO2_5: IC3.10 R43.1 | length 169
  Top Layer w10: IC3.10 1888.98,591.02 1948.52,531.48 R43.1
SERVO2_6: IC3.11 R46.1 | length 248
  Top Layer w10: IC3.11 1914.57,588.06 1974.63,528 2044,528 2066.68,505.32 R46.1
SERVO2_7: IC3.12 R53.1 | length 347.5
  Top Layer w10: IC3.12 1940.16,585.1 1981.25,544 2155,544 2184.84,514.16 R53.1
SERVO2_8: IC3.13 R54.1 | length 438.1
  Top Layer w10: IC3.13 1965.75,582.13 1987.88,560 2251,560 2303,508 R54.1
SERVO_1: IC2.6 R9.1 | length 529.6
  Top Layer w10: R9.1 58,527 116,585 472,585 484.61,597.61 IC2.6
SERVO_2: IC2.7 R10.1 | length 444.3
  Top Layer w10: R10.1 176.16,527.16 218,569 493.84,569 510.2,585.37 IC2.7
SERVO_3: IC2.8 R11.1 | length 353
  Top Layer w10: R11.1 294.32,532.32 315,553 500.47,553 535.8,588.33 IC2.8
SERVO_4: IC2.9 R12.1 | length 247.7
  Top Layer w10: R12.1 412.47,513.47 436,537 507.09,537 561.39,591.29 IC2.9
SERVO_5: IC2.10 R16.1 | length 167.7
  Top Layer w10: R16.1 530.63,537.91 586.98,594.26 IC2.10
SERVO_6: IC2.11 R17.1 | length 159.3
  Top Layer w10: IC2.11 612.57,566.43 648.79,530.21 R17.1
SERVO_7: IC2.12 R21.1 | length 223.4
  Top Layer w10: IC2.12 638.16,570.84 722.99,486.01 R21.1
SERVO_8: IC2.13 R22.1 | length 306.6
  Top Layer w10: IC2.13 663.75,586.88 741.81,508.82 806.18,508.82 829,486 R22.1
SERVO_9: IC2.18 R30.1 | length 646.6
  Top Layer w10: IC2.18 612.57,778.43 732,659 732,571 778.18,524.82 812.81,524.82 823.63,514 909,514 936.99,486.01 R30.1
SERVO_10: IC2.17 R31.1 | length 740.9
  Top Layer w10: IC2.17 638.16,775.47 748,665.63 748,577.63 784.81,540.82 819.43,540.82 830.25,530 915.63,530 935.63,510 1041,510 1065,486 R31.1
SERVO_11: IC2.16 R32.1 | length 836.1
  Top Layer w10: IC2.16 663.75,772.51 764,672.25 764,587 791.43,559.57 823.32,559.57 836.88,546 922.25,546 942.25,526 1158,526 1201,483 1236.57,483 R32.1
SERVO_12: IC2.15 R33.1 | length 929.6
  Top Layer w10: IC2.15 689.34,769.54 780,678.88 780,593.63 798.06,575.57 829.94,575.57 843.51,562 928.88,562 948.88,542 1258,542 1316,484 1355.73,484 R33.1
TX: J1.3 M1.34 | length 1245.8
  Top Layer w10: M1.34 1039.07,1668.85 1039.22,1669 1052.63,1669 1091,1707.37 1091,1780.37 1113.63,1803 v1(1733,1803) ; v1(1779,1854) J1.3
  Bottom Layer w10: v1(1733,1803) 1779,1849 v1(1779,1854)
VIN: C4.1 C7.2 C8.2 C9.2 C10.2 C11.2 C12.2 C14.2 C15.2 C16.2 C17.2 C18.2 C19.2 C20.2 C21.2 C22.2 C23.2 C25.2 C26.2 C27.2 C28.2 IC1.1 J2.1 | length 4650.6
  Top Layer w30: C7.2 C8.2 C9.2 C10.2 C11.2 C12.2 C14.2 C15.2 C16.2 C17.2 C18.2 C19.2 C20.2 C21.2 C22.2 C23.2 C25.2 C26.2 C27.2 C28.2 ; v1(1819,1497) 1819.76,1497.76 C4.1 1993.76,1497.76 2034,1538 2034,1659 2100,1725 J2.1
  Bottom Layer w30: v1(1819,1497) 1821,1495 IC1.1
  Bottom Layer w40: C27.2 2244,219.16 2244,466 2120,590 2120,1693 2152,1725 J2.1
pads on no net: IC1.4 IC2.19 IC2.20 IC2.21 IC2.22 IC3.15 IC3.16 IC3.17 IC3.18 IC3.19 IC3.20 IC3.21 IC3.22 J1.4 M1.4 M1.5 M1.6 M1.7 M1.9 M1.10 M1.13 M1.14 M1.16 M1.17 M1.18 M1.19 M1.20 M1.21 M1.22 M1.23 M1.24 M1.26 M1.27 M1.28 M1.29 M1.30 M1.32 U1.4

## Polygon pours and split planes (outlines as drawn)
GND on Top Layer "Top Layer-No Net" (solid, pour order 0): 0,0 0,1045 875,1045 875,2165.35 2362.2,2165.35 2362.2,0
GND on Bottom Layer "Top Layer-No Net" (solid, pour order 2): 0,0 0,1047 865,1047 865,2165.35 2362.2,2165.35 2362.2,0

## Keep-outs
Keep-Out Layer:
  the board outline again, w10

## Silkscreen, mask and mechanical layers (free items; w line width, h text height)
Top Overlay:
  text "VCC" at 2099,1673 h40 r90
  text "GND" at 2099,1446 h40 r90
  text "-" at 1935,1316 h40 r90
  text "+" at 1935,1212 h40 r90
  text "S" at 1935,1115 h40 r90
  text "S" at 267.5,778 h40
  text "S" at 2055.5,777 h40
  text "+" at 267.5,686.83 h40
  text "+" at 2055.5,685.83 h40
  text "-" at 267.5,589 h40
  text "-" at 2055.5,588 h40
  text "1" at 23,333 h40
  text "2" at 141.58,333 h40
  text "3" at 260.16,333 h40
  text "4" at 378.74,333 h40
  text "5" at 497.32,333 h40
  text "6" at 615.89,333 h40
  text "7" at 734.47,333 h40
  text "8" at 853.05,333 h40
  text "9" at 971.63,333 h40
  text "10" at 1090.21,333 h40
  text "11" at 1208.79,333 h40
  text "12" at 1327.37,333 h40
  text "13" at 1445.95,333 h40
  text "14" at 1564.53,333 h40
  text "15" at 1683.1,333 h40
  text "16" at 1801.68,333 h40
  text "17" at 1920.26,333 h40
  text "18" at 2038.84,333 h40
  text "19" at 2157.42,333 h40
  text "20" at 2276,333 h40
Bottom Overlay:
  drawing of 2330 lines, arcs and shapes, not listed

## Text inside footprints (layer, text, board x,y; h text height)
M1: Top Overlay "www.EvertDekker.com" at 242,2088.85 h19.68